# Altium PCB Flyback Converter PCB.PcbDoc (part 2 of 2)
Units mm, origin at the board's own origin, x right, y up, seen from the top; angles counter-clockwise.
Board outline 115 x 45 mm, 2 copper layers (Top Layer, Bottom Layer); 51 components, 31 nets, 145 pads, 23 vias.
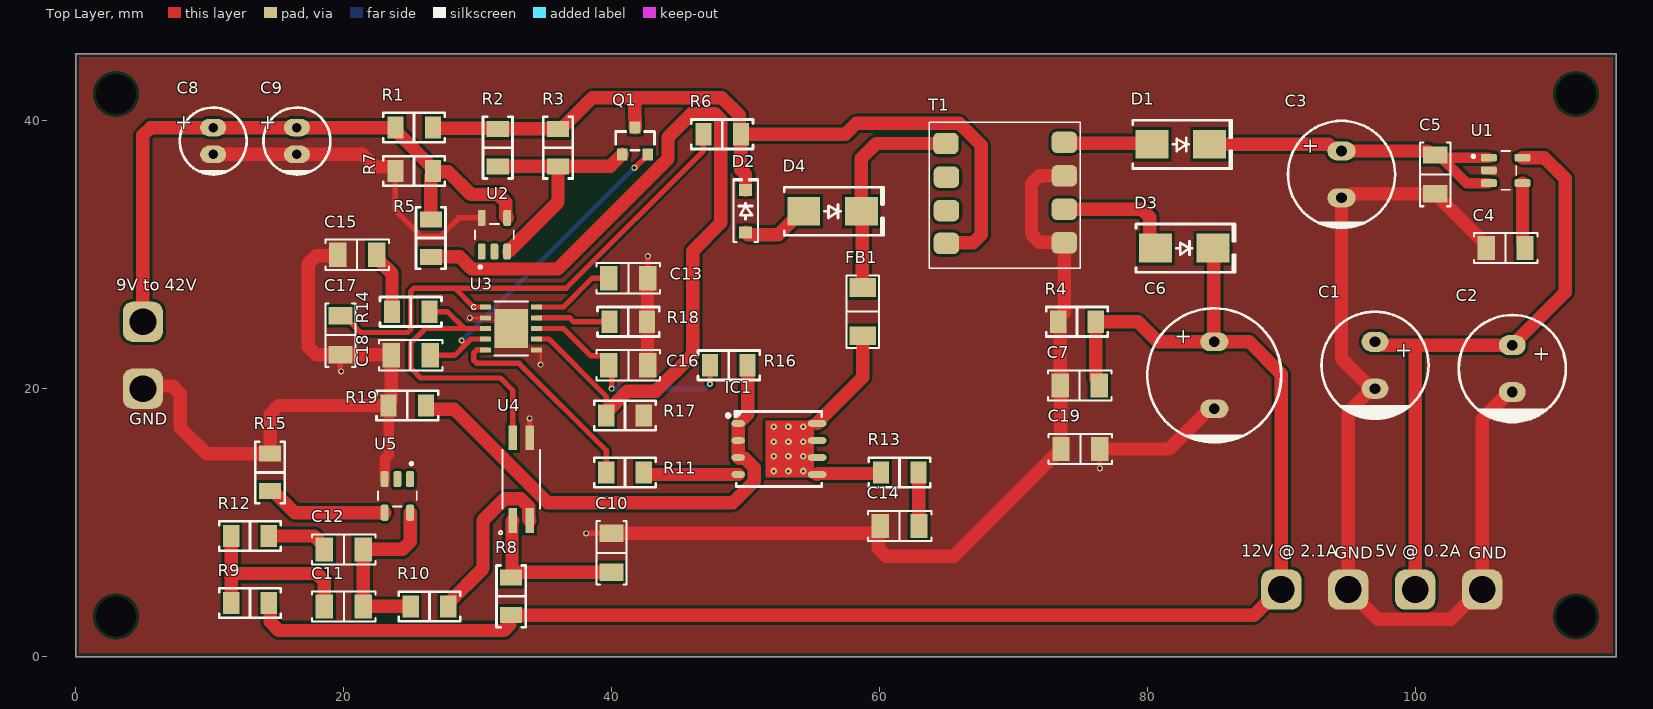
[diagram p0: Top Layer view]

## Via types
v1: diameter 0.5, hole 0.2, Top Layer to Bottom Layer, tented top, 12 vias
v2: diameter 0.45, hole 0.25, Top Layer to Bottom Layer, 11 vias

## Nets (pads, with @x,y where several pads share a name; then routed paths per layer and width w, separated by ;. In a path a pad name is that pad's centre, name@x,y a point inside that pad or via, vN(x,y) a via of type N, cw(c..) or ccw(c..) an arc to the next point about the centre after c; other vN are vias at no path point) (continued)
NetC14_2: (continued)
  Top Layer w1: R13.1 62.925,13.725 62.925,9.775 C14.2
NetC15_2: C15.2 R14.1 | length 4.7
  Top Layer w1: C15.2 22.45,29.75 23.6,28.6 R14.1
NetC16_2: C16.2 R16.1 U3.8 | length 17.4
  Top Layer w0.4: U3.8 36.4,24.5 38.45,22.45 39.35,22.45 39.8,22 C16.2 40,21.55 v2(40,20) ; v2(47.35,20.35) R16.1
  Bottom Layer w0.4: v2(40,20) 47,20 v2(47.35,20.35)
NetC17_2: C17.2 R6.1 U3.1 | length 39
  Top Layer w0.4: C17.2 20,25.45 21.25,24.2 24.766,24.2 25,24.434 25,27.266 25.234,27.5 28.3,27.5 ; U3.1 29.7,26.1 28.3,27.5 ; R6.1 46.85,37.75 36.6,27.5 28.3,27.5
NetC18_2: C18.2 Q1.2 U3.4 | length 24.8
  Top Layer w0.4: C18.2 28.3,22.5 29.1,23.3 ; v2(28.8,23.6) 29.1,23.3 ; U3.4 29.513,23.713 29.1,23.3 ; v2(41.7,36.5) 41.71,36.51 41.76,36.51 42.7,37.45 Q1.2
  Bottom Layer w0.4: v2(28.8,23.6) v2(41.7,36.5)
NetD1_1: D1.1 T1.5 | length 6.6
  Top Layer w1: T1.5 73.875,38.325 80.275,38.325 D1.1
NetD2_1: D2.1 D4.1 | length 5.1
  Top Layer w1: D2.1 50.175,31.5 52.45,31.5 54.2,33.25 D4.1
NetD2_2: D2.2 Q1.3 R1.2 R2.2 R3.2 R6.2 T1.4 | length 61.1
  Top Layer w1: R1.2 26.7,39.45 31.45,39.45 R2.2 R3.2 36.225,39.4 38.55,41.725 41.725,41.725 ; Q1.3 41.75,40.25 41.725,40.275 41.725,41.725 ; D2.2 50,36 49.65,36.35 R6.2 ; T1.4 65.25,31.1 65.45,30.9 67.014,30.9 67.6,31.486 67.6,38.171 65.961,39.81 58.26,39.81 57.45,39 R6.2 ; 41.725,41.725 48.237,41.725 49.55,40.412 49.55,39.1 R6.2
NetD3_1: D3.1 T1.7 | length 9.1
  Top Layer w1: T1.7 79.6,33.4 80.186,32.814 80.186,30.914 D3.1
NetD4_2: D4.2 FB1.2 T1.1 | length 16.5
  Top Layer w1: FB1.2 58.7,27.6 58.7,33.2 D4.2 58.65,37.214 59.746,38.31 T1.1
NetFB1_1: FB1.1 IC1.5 IC1.6 IC1.7 IC1.8 R13.2 | length 12.8
  Top Layer w1: IC1.5 55.428,13.672 60.022,13.672 R13.2 ; IC1.8 55.35,17.455 58.75,20.855 FB1.1
  other v1: 52.1,13.85 53.2,13.85 54.3,13.85 52.1,14.95 53.2,14.95 54.3,14.95 52.1,16.05 53.2,16.05 54.3,16.05 52.1,17.15 53.2,17.15 54.3,17.15
NetQ1_1: Q1.1 R2.1 R3.1 U2.3 | length 17.9
  Top Layer w0.4: U2.3 U2.3@32.2,30.555
  Top Layer w1: R2.1 R3.1 ; U2.3@32.3,30.245 36,33.945 R3.1 ; Q1.1 39.9,36.6 R3.1
NetR5_1: R5.1 R17.2 U3.7 | length 63.3
  Top Layer w0.4: U3.7 35.312,23.713 39.6,19.425 R17.2@39.6,18.225
  Top Layer w1: R5.1@26.325,29.8 26.275,29.85 R5.1 28.65,29.85 29.56,28.94 35.98,28.94 44.206,37.166 44.206,38.771 45.96,40.525 47.74,40.525 48.15,40.115 48.15,32.387 46.05,30.287 46.05,22.56 43.29,19.8 41.175,19.8 39.6,18.225 R17.2
NetR10_1: R10.1 U4.2 | length 12.9
  Top Layer w1: R10.1 27.8,3.975 30.4,6.575 30.4,10.18 32.005,11.785 33.225,11.785 33.815,11.195 33.815,10.235 U4.2
NetR11_1: R11.1 U3.5 | length 15.9
  Top Layer w0.4: U3.5 29.934,22.9 29.7,22.666 29.7,22.134 29.934,21.9 33.1,21.9 39.6,15.4 R11.1
NetR11_2: IC1.4 R11.2 | length 7.1
  Top Layer w1: R11.2 42.4,13.695 42.5,13.595 IC1.4
NetR14_2: R14.2 U3.3 U4.4 | length 22.9
  Top Layer w0.4: R14.2 27.75,25.75 29,24.5 ; U3.3 29,24.5 ; U4.4 32.615,19.885 31.7,20.8 25.734,20.8 25,21.534 25,23.4 26.1,24.5 29,24.5
NetR15_2: R15.2 U5.4 | length 9.2
  Top Layer w1: R15.2 14.725,12.35 16.33,10.745 U5.4
NetR16_2: IC1.1 IC1.2 IC1.3 R16.2 R19.2 | length 38
  Top Layer w1: R19.2 26.15,18.57 26.25,18.47 28.25,18.47 35.22,11.5 49.052,11.5 50.65,13.098 50.65,14.092 49.947,14.795 49.52,14.795 IC1.3 IC1.2 IC1.1 50.15,18.105 R16.2
NetR18_2: R18.2 U3.9 | length 5.6
  Top Layer w0.4: U3.9 36.876,25.287 37.163,25 R18.2
pads on no net: T1.2 T1.3 U2.1 U2.2 U5.1 U5.2

## Polygon pours and split planes (outlines as drawn)
GND on Top Layer "GND_L01_P000" (solid, remove dead copper, pour order 0): 0,45 115,45 115,0 0,0
GND on Bottom Layer "GND_L02_P001" (solid, remove dead copper, pour order 1): 0,45 115,45 115,0 0,0

## Keep-outs
Keep-Out Layer:
  the board outline again, w0.1

## Silkscreen, mask and mechanical layers (free items; w line width, h text height)
Top Overlay:
  text "9V to 42V" at 3,27.012 h1.52
  text "GND" at 4,17.01 h1.52
  text "12V @ 2.1A" at 87,7.149 h1.52
  text "5V @ 0.2A" at 97,7.149 h1.52
  text "GND" at 94,7.01 h1.52
  text "GND" at 104,7.01 h1.52

## Text inside footprints (layer, text, board x,y; h text height)
C1: Top Overlay "+" at 98.25,23.5 h2 r270
C2: Top Overlay "+" at 108.5,23.25 h2 r270
C3: Top Overlay "+" at 93.1,37.45 h2 r90
C6: Top Overlay "+" at 83.6,23.2 h2 r90
C8: Top Overlay "+" at 9,39.2 h2 r90
C9: Top Overlay "+" at 15.25,39.2 h2 r90